# Altium PCB ADS8688.PcbDoc
Units mil, origin at the board's own origin, x right, y up, seen from the top; angles counter-clockwise.
Board outline 800 x 700 mil, 2 copper layers (Top Layer, Bottom Layer), stack 31.496 mil thick; 30 components, 47 nets, 145 pads, 41 vias.
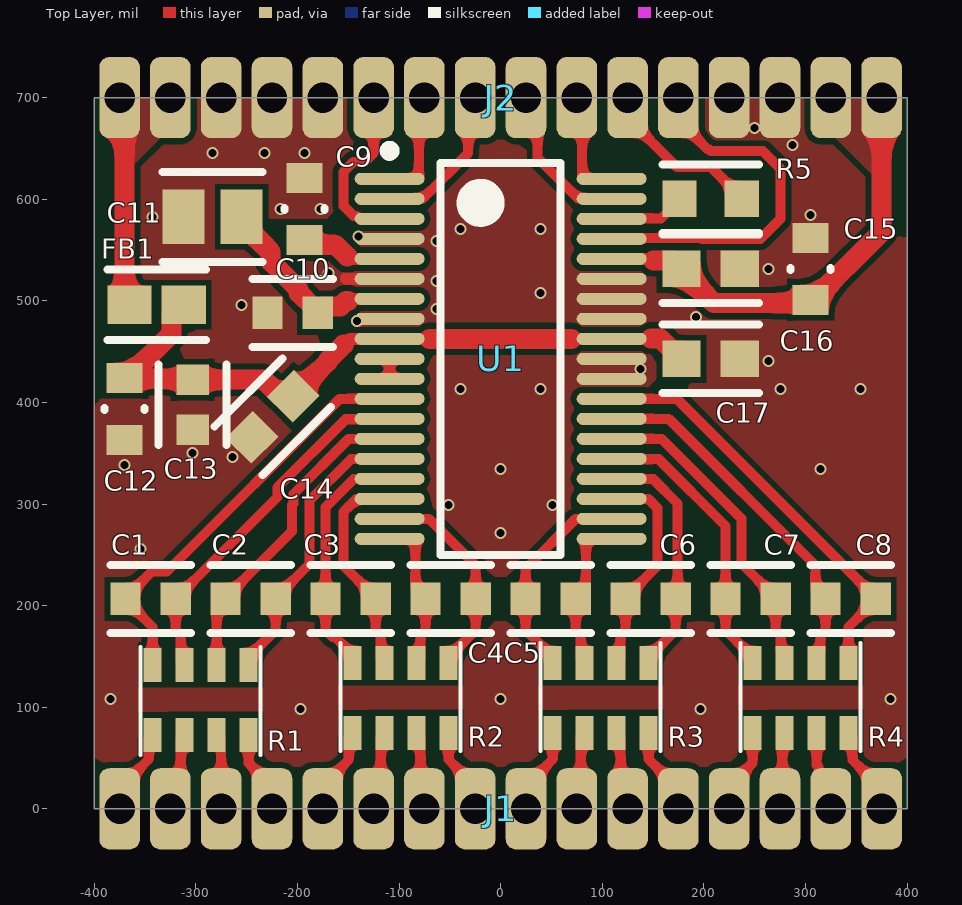
[diagram p0: Top Layer view]
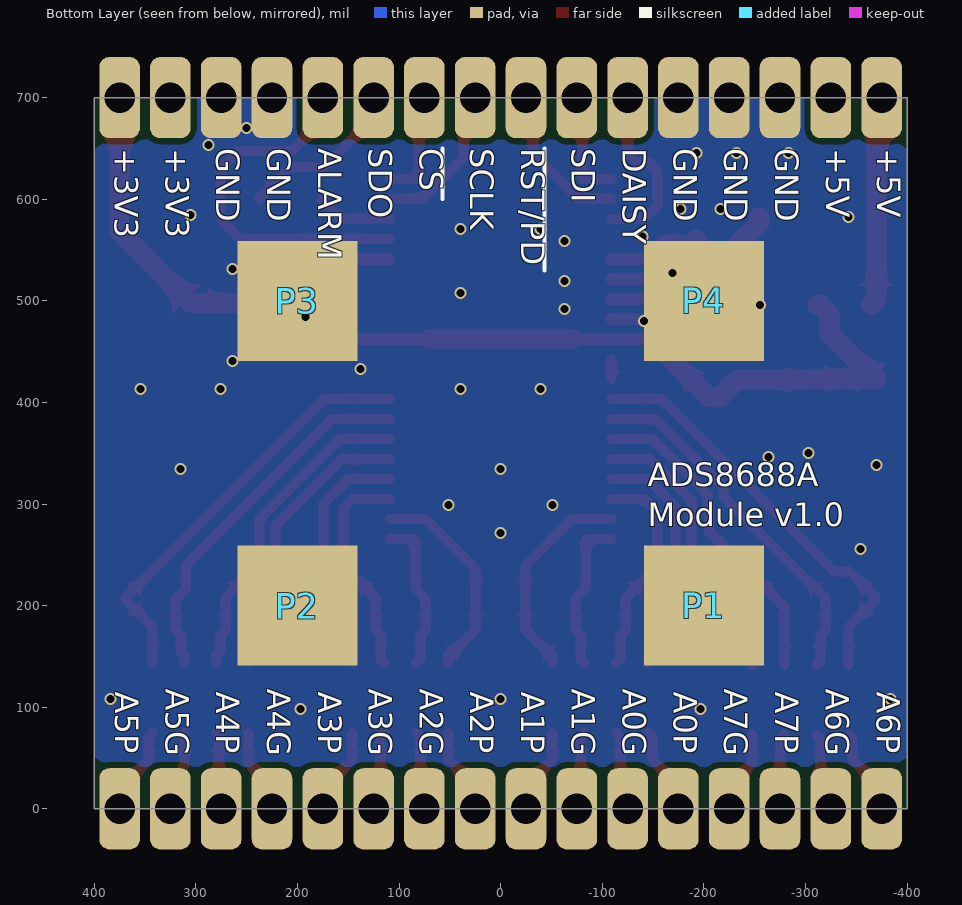
[diagram p1: Bottom Layer view, seen from below]
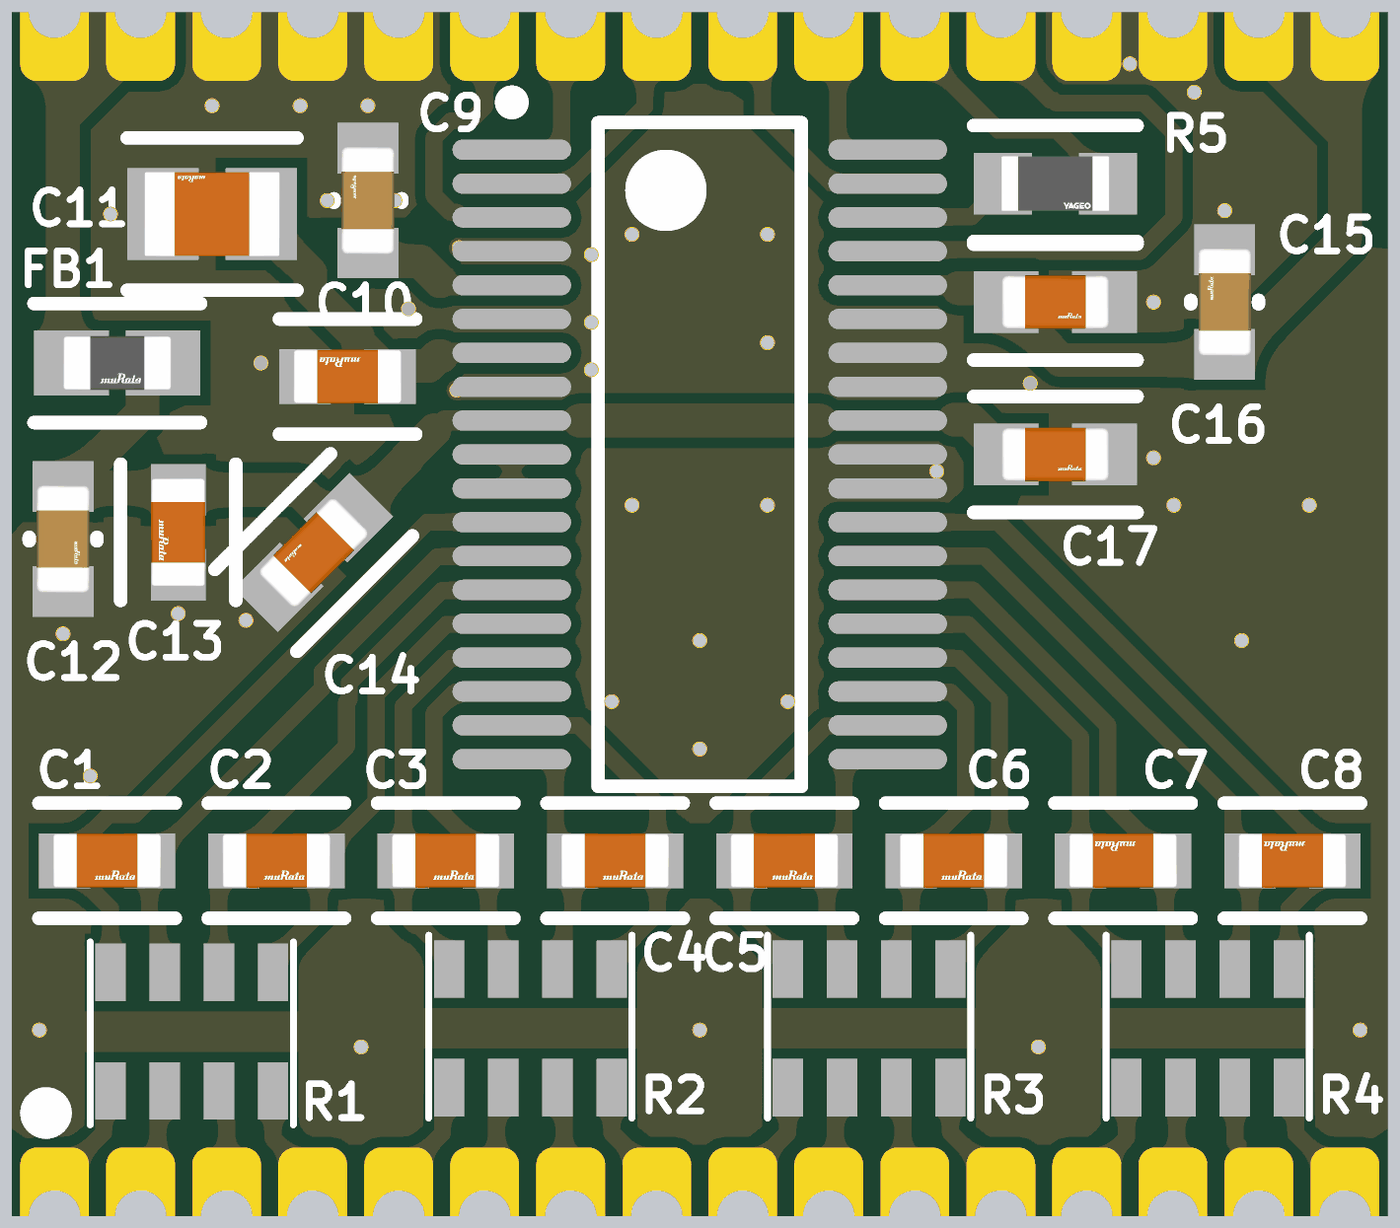
[diagram p2: 3D render of the assembled board from above, using the file's embedded part models]

## Layer stack, top to bottom
Top Solder: solder mask 0.3937, Solder Resist, Dk 3.5
Top Layer: signal copper 1.378
Dielectric 1: dielectric 28.7402, FR-4, Dk 4.8
Bottom Layer: signal copper 1.378
Bottom Solder: solder mask 0.3937, Solder Resist, Dk 3.5

## Board outline
400,0 400,700 -400,700 -400,0

## Design rules (kind name [scope] priority, off if disabled: settings)
Clearance Clearance_1 [OnMid vs OnMid] p1: gap=5.91 ignorepadtopadclearanceinfootprint=FALSE sourcerule=41 cellrowname=All cellrowtype=0 cellcolname=All cellcoltype=0 innerlayers=TRUE
Clearance Clearance_2 [(ExistsOnLayer('Top Layer') Or ExistsOnLayer('Bottom Layer')) vs (ExistsOnLayer('Top Layer') Or ExistsOnLayer('Bottom Layer'))] p2: gap=5.91 ignorepadtopadclearanceinfootprint=FALSE sourcerule=41 cellrowname=All cellrowtype=0 cellcolname=All cellcoltype=0 outerlayers=TRUE
Clearance [All] p3: gap=10 ignorepadtopadclearanceinfootprint=FALSE ismatrix=TRUE
DiffPairsRouting [All] p1: maxlimit=5.91 minlimit=5.91 mostfreqgap=5.91 toplayer_minwidth=15 toplayer_maxwidth=15 toplayer_prefwidth=15 bottomlayer_minwidth=15 bottomlayer_maxwidth=15 bottomlayer_prefwidth=15 maxuncoupledlength=500
PolygonConnect "Schematic Polygon Connect Style" [InNetClass('Power')] p1: connectstyle=Direct reliefconductorwidth=10 reliefentries=4 polygonreliefangle="90 Angle" airgapwidth=10
PolygonConnect [All] p2: connectstyle=Relief reliefconductorwidth=10 reliefentries=4 polygonreliefangle="90 Angle" airgapwidth=10
RoutingVias [All] p1: holewidth=28 width=50 viastyle="Through Hole" minholewidth=28 minwidth=50 maxholewidth=28 maxwidth=50
SolderMaskExpansion [All] p1: expansion=0 istentingtop=FALSE
SupplyNets "Schematic Supply Nets_2" [InNet('REFGND')] p1: voltage=0.000
SupplyNets "Schematic Supply Nets_1" [InNet('DVDD')] p2: voltage=0.000
SupplyNets "Schematic Supply Nets" [InNet('+5')] p3: voltage=0.000
Width "Schematic Width Constraint" [InNetClass('Power')] p1: maxlimit=39.37 minlimit=11.81 preferedwidth=19.68 minimp=50.000000 maximp=50.000000 favimp=50.000000
Width [All] p2: maxlimit=9.84 minlimit=9.84 preferedwidth=9.84 minimp=50.000000 maximp=50.000000 favimp=50.000000
29 further rules are at their usual default settings.

## Classes and differential pairs
net class Power: +5 AVDD DVDD REFCAP REFGND REFIO

## Components (designator, comment, footprint, x,y, rotation, side; value= is the part's Value field where it differs from the comment)
C1 "10 nF" FP-GRT188-0_1-e0_2_0_5-IPC_C -344.49,206.69 r0 top
C2 "10 nF" FP-GRT188-0_1-e0_2_0_5-IPC_C -246.06,206.69 r0 top
C3 "10 nF" FP-GRT188-0_1-e0_2_0_5-IPC_C -147.64,206.69 r0 top
C4 "10 nF" FP-GRT188-0_1-e0_2_0_5-IPC_C -49.21,206.69 r0 top
C5 "10 nF" FP-GRT188-0_1-e0_2_0_5-IPC_C 49.21,206.69 r0 top
C6 "10 nF" FP-GRT188-0_1-e0_2_0_5-IPC_C 147.64,206.69 r0 top
C7 "10 nF" FP-GRT188-0_1-e0_2_0_5-IPC_C 344.49,206.69 r180 top
C8 "10 nF" FP-GRT188-0_1-e0_2_0_5-IPC_C 246.06,206.69 r180 top
C9 "10 uF" FP-GRT188-0_2-MFG -192.91,590.55 r90 top
C10 "1 uF" FP-GRT188-0_1-e0_2_0_5-IPC_C -204.72,488.19 r180 top
C11 "22 uF" FP-GRT21B-0_2-IPC_C -283.46,582.68 r180 top
C12 "10 uF" FP-GRT188-0_2-MFG -370.08,393.7 r270 top
C13 "1 uF" FP-GRT188-0_1-e0_2_0_5-IPC_C -303.15,397.64 r270 top
C14 "100 nF" FP-GCM188-0_1-IPC_B -224.41,385.83 r225 top
C15 "10 uF" FP-GRT188-0_2-MFG 305.12,531.5 r90 top
C16 "100 nF" FP-GCM188-0_1-IPC_B 206.69,531.5 r0 top
C17 "100 nF" FP-GCM188-0_1-IPC_B 206.69,442.91 r0 top
FB1 "BLM18AG601BH1D" FP-BLM18-0_15-t0_8-IPC_B -338.58,496.06 r0 top
J1 "Castellation_16" Castellation_16_hole 0,0 r90 top
J2 "Castellation_16" Castellation_16_hole 0,700 r90 top
P1 "BottomPad" BottomPad -200,200 r180 bottom
P2 "BottomPad" BottomPad 200,200 r180 bottom
P3 "BottomPad" BottomPad 200,500 r180 bottom
P4 "BottomPad" BottomPad -200,500 r180 bottom
R1 "1k" CAY16A-1001F4LF -295.28,108.27 r0 top
R2 "1k" CAY16A-1001F4LF -98.43,108.27 r180 top
R3 "1k" CAY16A-1001F4LF 98.43,108.27 r180 top
R4 "1k" CAY16A-1001F4LF 295.28,108.27 r180 top
R5 "22Ω" FP-AC0603-IPC_B 206.69,600.39 r0 top
U1 "ADS8688AIDBTR" DBT38_N 0,442.91 r0 top

## Footprints (in the part's own frame and the unit in brackets; to place one, negate y for a bottom-side part, rotate by r counter-clockwise, add the part's x,y. Pads: shape width x height; smd on the part's side, far side on the other; paste and mask are expansions set on the pad)
BottomPad [mm]
  rect 3x3 smd: 1(0,0)
Castellation_16_hole [mil]
  rrect50% 80x40 hole 30: 1(0,375) 2(0,325) 3(0,275) 4(0,225) 5(0,175) 6(0,125) 7(0,75) 8(0,25) 9(0,-25) 10(0,-75) 11(0,-125) 12(0,-175) 13(0,-225) 14(0,-275) 15(0,-325) 16(0,-375)
CAY16A-1001F4LF [mm] "1kΩ Register array"
  rect 0.45x0.85 smd: 1(-1.2,-0.9) 2(-0.4,-0.9) 3(0.4,-0.9) 4(1.2,-0.9) 5(1.2,0.85) 6(0.4,0.85) 7(-0.4,0.85) 8(-1.2,0.85)
  silkscreen extent -1.5,-1.4 1.5,1.3, body extent -1.4,-1.2 1.4,1.1, height 0.25
DBT38_N [mm] "TSSOP, 38-Leads, Body 9.7x4.4mm, Pitch 0.5mm, IPC Medium Density"
  oval 1.75x0.3 smd: 1(-2.775,4.5) 2(-2.775,4) 3(-2.775,3.5) 4(-2.775,3) 5(-2.775,2.5) 6(-2.775,2) 7(-2.775,1.5) 8(-2.775,1) 9(-2.775,0.5) 10(-2.775,0) 11(-2.775,-0.5) 12(-2.775,-1) 13(-2.775,-1.5) 14(-2.775,-2) 15(-2.775,-2.5) 16(-2.775,-3) 17(-2.775,-3.5) 18(-2.775,-4) 19(-2.775,-4.5) 20(2.775,-4.5) 21(2.775,-4) 22(2.775,-3.5) 23(2.775,-3) 24(2.775,-2.5) 25(2.775,-2) 26(2.775,-1.5) 27(2.775,-1) 28(2.775,-0.5) 29(2.775,0) 30(2.775,0.5) 31(2.775,1) 32(2.775,1.5) 33(2.775,2) 34(2.775,2.5) 35(2.775,3) 36(2.775,3.5) 37(2.775,4) 38(2.775,4.5)
  silkscreen extent -2.9,-4.9 1.5,5.32, body extent -2.25,-4.9 2.25,4.9, height 1.2
FP-AC0603-IPC_B [mil]
  rect 33.81x35.91 smd paste+0 mask+0: 1(-30.58,0) 2(30.58,0)
  silkscreen extent -47,-34 47,34, body extent -57,-28 57,28, height 10
FP-BLM18-0_15-t0_8-IPC_B [mil]
  rect 43.55x37.73 smd paste+0 mask+0: 1(-26.62,0) 2(26.62,0)
  silkscreen extent -48,-35 48,35, body extent -58,-29 58,29, height 10
FP-GCM188-0_1-IPC_B [mil]
  rect 37.74x35.91 smd paste+0 mask+0: 1(-28.61,0) 2(28.61,0)
  silkscreen extent -47,-34 47,34, body extent -57,-28 57,28, height 10
FP-GRT21B-0_2-IPC_C [mil]
  rect 41.52x53.39 smd paste+0 mask+0: 1(-28.57,0) 2(28.57,0)
  silkscreen extent -49,-44 49,44, body extent -53,-32 53,32, height 10
FP-GRT188-0_1-e0_2_0_5-IPC_C [mil]
  rect 29.87x31.97 smd paste+0 mask+0: 1(-24.67,0) 2(24.67,0)
  silkscreen extent -40,-33 40,33, body extent -44,-22 44,22, height 10
FP-GRT188-0_2-MFG [mm]
  rect 0.75x0.9 smd paste+0 mask+0: 1(-0.775,0) 2(0.775,0)
  silkscreen extent -0.03,-0.5 0.03,0.5, body extent -1.25,-0.6 1.25,0.6, height 0.25

## Part data
C1 C2 C3 C4 C5 C6 C7 C8: library part CMP-06035-024823-1, "Multi-Layer Ceramic Capacitor 10nF 25V C0G ±1% 0603 Paper T/R / GRT1885C1E103FA02D / 0603"
C9 C12 C15: library part CMP-06035-032378-1, "Multi-Layer Ceramic Capacitor 10uF 25V X5R ±20% 0603 Paper T/R / GRT188R61E106ME13D / 10 uF", Capacitance=10uF, Case Code (Imperial)=0603, Case Code (Metric)=1608, Max Operating Temperature=85°C, Min Operating Temperature=-55°C, Ratings=AEC-Q200, Tolerance=20%, Voltage Rating=25V, Case/Package=0603, Length=0.063inch, Mount="Surface Mount", Packaging="Tape and Reel", Thickness=0.035inch, Width=0.031inch
C10 C13: library part CMP-06035-050353-1, "Multi-Layer Ceramic Capacitor 1uF 25V X7R ±10% 0603 Paper T/R / GRT188R71E105KE13D / 1 uF"
C11: library part CMP-06035-011672-1, "Multi-Layer Ceramic Capacitor 22uF 25V X5R ±20% 0805 Emboss T/R / GRT21BR61E226ME13L / 22 uF", Capacitance=22uF, Case Code (Imperial)=0805, Case Code (Metric)=2012, Max Operating Temperature=85°C, Min Operating Temperature=-55°C, Ratings=AEC-Q200, Tolerance=20%, Voltage Rating=25V, Case/Package=0805, Length=0.079inch, Mount="Surface Mount", Packaging="Tape and Reel", Thickness=0.057inch, Width=0.049inch
C14 C16 C17: library part CMP-06035-005116-1, "Ceramic Capacitor for Automotive 100nF  ±20% 25VDC X8R 0603 Paper T/R / GCM188R91E104MA37J / 100 nF"
FB1: library part CMP-06046-002494-1, "Chip Ferrite Bead, 0603, 600Ω @ 100MHz, 0.38Ω, 25%, 500mA", Case Code (Imperial)=0603, Case Code (Metric)=1608, DC Resistance (DCR)=380mR, Max Current Rating=500mA, Max Operating Temperature=150°C, Min Operating Temperature=-55°C, Ratings=AEC-Q200, Case/Package=0603, Number of Lines=1, RoHS Compliant=Yes
J1 J2: "8 holes"
R1 R2 R3 R4: library part CAY16A-1001F4LF
R5: library part CMP-03412-040387-1, "RES 22Ω 5.00% 0.1W 0603 / AC0603JR-0722RL", Case Code (Imperial)=0603, Case Code (Metric)=1608, Max Operating Temperature=155°C, Max Power Dissipation=100mW, Min Operating Temperature=-55°C, Ratings=AEC-Q200, Resistance=22R, Resistor Type="Thick Film", Temperature Coefficient=100ppm/°C, Tolerance=5%, Voltage Rating=50V, Case/Package=0603, Features="Moisture Resistant", Height=0.45mm, Length=1.6mm, Number of Terminations=2, Packaging="Tape and Reel", Power Rating=100mW, Series=AC, Termination=SMD/SMT, Width=0.8mm
U1: "Single-Supply, SAR ADCs with Bipolar Input Ranges, 16 Bits, 500 kSPS, 8 Channel, -40 to 125 degC, 38-Pin TSSOP (DBT), Green (RoHS & no Sb/Br), Tape and Reel", Manufacturer="Texas Instruments", PartNumber=ADS8688IDBTR, Temperature Range="-40 to 125 degC", AVDD="4.75 to 5.25 V", ComponentLink1Description="Manufacturer URL", ComponentLink1URL=www.ti.com, ComponentLink2Description=Datasheet, ComponentLink2URL=http://www.ti.com/lit/ds/symlink/ads8688.pdf, ComponentLink3Description="Package Specification", ComponentLink3URL=http://www.ti.com/lit/ml/mpds368/mpds368.pdf, DatasheetVersion=SBAS582B, Eco-Plan="Green (RoHS & no Sb/Br)", Input Channel=8, Mounting Technology="Surface Mount", PackageDescription="38-Pin Plastic Small Outline Package, Body 9.7 x 4.4 mm, Pitch 0.5 mm", PackageVersion=4073252-6/I, Packing="Tape and Reel", Resolution="16 Bits", Sample Rate="500 kSPS", SNR="92 dB", THD="-102 dB"

## Free pads (board coordinates)
  round 30 on Top Overlay: ""(-380,60)

## Via types
v1: diameter 11.81, hole 7.87, Top Layer to Bottom Layer, tented both sides, 36 vias
v2: diameter 11.81, hole 7.87, Top Layer to Bottom Layer, tented top, 5 vias

## Nets (pads, with @x,y where several pads share a name; then routed paths per layer and width w, separated by ;. In a path a pad name is that pad's centre, name@x,y a point inside that pad or via, vN(x,y) a via of type N, cw(c..) or ccw(c..) an arc to the next point about the centre after c; other vN are vias at no path point)
+5: FB1.1 J2.1 J2.2 | length 208
  Top Layer w19.68: J2.1 -370.1,695.1 -370.1,500.96 FB1.1
AIN_0GND: J1.6 R2.6 | length 79.3
  Top Layer w9.84: J1.6 -118.11,6.89 -118.11,70.87 R2.6
AIN_0GND_m: C3.2 R2.3 U1.17 | length 215.9
  Top Layer w9.84: R2.3 -118.11,147.64 -118.11,171.09 -122.96,175.94 -122.96,207.74 -154.53,239.31 -154.53,292.36 -142.15,304.74 -109.63,304.74 U1.17
AIN_0P: J1.5 R2.5 | length 87
  Top Layer w9.84: J1.5 -175,22.75 -149.61,48.14 -149.61,70.87 R2.5
AIN_0P_m: C3.1 R2.4 U1.16 | length 240.2
  Top Layer w9.84: R2.4 -145.67,151.57 -163.08,168.98 -165.35,168.98 -172.31,175.94 -172.31,296.85 -144.74,324.43 -109.63,324.43 U1.16
AIN_1GND: J1.7 R2.7 | length 78
  Top Layer w9.84: R2.7 -78.84,70.96 -78.84,3.84 J1.7
AIN_1GND_m: C4.1 R2.2 U1.19 | length 154.7
  Top Layer w9.84: U1.19 -84.81,265.75 -83.9,264.84 -83.9,217.76 -73.89,207.74 -73.89,175.94 -78.74,171.09 -78.74,147.64 R2.2
AIN_1P: J1.8 R2.8 | length 85.6
  Top Layer w9.84: R2.8 -51.18,48.42 -25,22.24 J1.8
AIN_1P_m: C4.2 R2.1 U1.18 | length 211.9
  Top Layer w9.84: U1.18 -70.43,285.43 -24.54,239.54 C4.2 -24.54,175.94 -44.97,155.51 -47.24,155.51 -51.18,151.57 R2.1
AIN_2GND: J1.10 R3.6 | length 78
  Top Layer w9.84: J1.10 78.84,3.84 78.84,70.96 R3.6
AIN_2GND_m: C5.2 R3.3 U1.20 | length 154.7
  Top Layer w9.84: R3.3 78.74,147.64 78.74,171.09 73.89,175.94 C5.2 83.9,216.71 83.9,264.84 84.81,265.75 U1.20
AIN_2P: J1.9 R3.5 | length 85.6
  Top Layer w9.84: J1.9 25,22.24 51.18,48.42 R3.5
AIN_2P_m: C5.1 R3.4 U1.21 | length 208.3
  Top Layer w9.84: C5.1 24.54,175.94 44.97,155.51 47.24,155.51 51.18,151.57 R3.4 ; C5.1@24.54,207.74 24.54,236.03 73.57,285.06 U1.21@108.88,285.06
AIN_3GND: J1.11 R3.7 | length 79.3
  Top Layer w9.84: R3.7 118.11,70.87 118.11,6.89 J1.11
AIN_3GND_m: C6.1 R3.2 U1.22 | length 218
  Top Layer w9.84: U1.22 109.63,304.74 145.7,304.74 154.53,295.92 154.53,239.31 122.96,207.74 122.96,175.94 118.11,171.09 118.11,147.64 R3.2
AIN_3P: J1.12 R3.8 | length 87
  Top Layer w9.84: R3.8 145.67,48.78 175,19.45 J1.12
AIN_3P_m: C6.2 R3.1 U1.23 | length 245
  Top Layer w9.84: U1.23 109.63,324.43 150.3,324.43 174.21,300.52 174.21,208.59 C6.2 172.31,175.94 151.88,155.51 149.61,155.51 145.67,151.57 R3.1
AIN_4GND: J1.13 R4.5 | length 84.3
  Top Layer w9.84: J1.13 225,22.24 248.03,45.27 R4.5
AIN_4GND_m: C8.2 R4.4 U1.24 | length 286.6
  Top Layer w9.84: U1.24 109.63,344.11 155.67,344.11 221.39,278.4 C8.2 221.39,175.94 241.82,155.51 244.09,155.51 248.03,151.57 R4.4
AIN_4P: J1.14 R4.6 | length 76.7
  Top Layer w9.84: J1.14 277.26,2.26 277.26,72.54 R4.6
AIN_4P_m: C8.1 R4.3 U1.25 | length 319.8
  Top Layer w9.84: U1.25 158.46,364.17 237.14,285.5 237.14,241.34 270.74,207.74 270.74,175.94 275.59,171.09 275.59,155.51 279.53,151.57 R4.3
AIN_5GND: J1.15 R4.7 | length 80.5
  Top Layer w9.84: R4.7@311.11,74.8 311.11,43.31 313.06,41.36 313.06,12.03 J1.15
AIN_5GND_m: C7.2 R4.2 U1.26 | length 364
  Top Layer w9.84: U1.26 165.49,383.86 309.8,239.55 309.8,216.71 C7.2 319.81,175.94 314.96,171.09 314.96,155.51 311.02,151.57 R4.2
AIN_5P: J1.16 R4.8 | length 88.3
  Top Layer w9.84: R4.8 346.46,70.87 346.46,48 375,19.45 J1.16
AIN_5P_m: C7.1 R4.1 U1.27 | length 416.1
  Top Layer w9.84: U1.27 173.36,403.54 369.16,207.74 369.16,205.64 342.52,179 R4.1
AIN_6GND: J1.2 R1.2 | length 78.6
  Top Layer w9.84: J1.2 -314.96,10.04 -314.96,68.9 R1.2
AIN_6GND_m: C1.2 R1.7 U1.13 | length 359.8
  Top Layer w9.84: C1.2 C1.2@-319.81,207.74 ; R1.7 -314.96,145.67 -314.96,171.09 -319.81,175.94 C1.2@-319.81,207.74 ; U1.13 -109.63,383.48 -152.49,383.48 -219.56,316.42 -219.56,306.95 -308.75,217.76 -309.8,217.76 C1.2@-319.81,207.74
AIN_6P: J1.1 R1.1 | length 86.3
  Top Layer w9.84: J1.1 -375,20 -346.46,48.54 -346.46,68.9 R1.1
AIN_6P_m: C1.1 R1.8 U1.12 | length 419.1
  Top Layer w9.84: C1.1 C1.1@-369.16,207.74 ; R1.8 -342.52,179 -369.16,205.64 C1.1@-369.16,207.74 ; U1.12 -158.39,403.54 -328.43,233.51 -343.4,233.51 C1.1@-369.16,207.74
AIN_7GND: J1.4 R1.4 | length 82.4
  Top Layer w9.84: R1.4 -248.03,45.27 -225,22.24 J1.4
AIN_7GND_m: C2.2 R1.5 U1.15 | length 281.4
  Top Layer w9.84: R1.5 -248.03,149.61 -230.18,167.46 -229.87,167.46 -221.39,175.94 C2.2 ; C2.2@-221.39,207.74 -188.06,241.07 -188.06,303.37 -147.32,344.11 -109.63,344.11 U1.15
AIN_7P: J1.3 R1.3 | length 74.7
  Top Layer w9.84: R1.3 -275.59,68.9 -275.59,55.35 -275,54.76 J1.3
AIN_7P_m: C2.1 R1.6 U1.14 | length 316.6
  Top Layer w9.84: R1.6 -279.53,198.95 -205.31,273.17 -205.31,298.92 -203.81,300.43 -203.81,309.9 -149.91,363.8 -109.63,363.8 U1.14
ALARM: J2.12 U1.35 | length 367.2
  Top Layer w9.84: U1.35 138.33,561.02 139.31,562.01 197.12,562.01 198.1,561.02 255.91,561.02 275.59,580.71 275.59,629.92 258.31,647.2 207.31,647.2 205.66,648.86 203.9,648.86 175,677.76 J2.12
AVDD: C12.1 C13.1 C14.1 C17.1 FB1.2 U1.9 U1.30 | length 682.7
  Top Layer w11.81: -154.32,456.91 -154.08,456.91 -148.39,462.6 -70.41,462.6 ; 70.41,462.6 142.76,462.6 143.3,463.15 148.19,463.15
  Top Layer w19.68: FB1.2 -314.88,496.06 -323.9,487.04 -323.9,467.44 -362.2,429.13 -365.16,429.13 C12.1 -369.13,423.26 -304.1,423.26 C13.1 -233.2,422.31 -216.3,405.41 -204.83,405.41 -169.95,440.28 -169.95,441.38 -154.42,456.91 -154.32,456.91 ; -69.77,462.6 69.77,462.6 ; 148.19,463.15 156.93,463.15 169.05,451.03 C17.1@177.17,451.03
C\S\: J2.10 U1.38 | length 110.5
  Top Layer w9.84: J2.10 80.33,694.67 80.33,620.99 81.24,620.08 U1.38
DAISY: J2.6 U1.3 | length 175.9
  Top Layer w9.84: J2.6 -125,645.24 -133.43,636.81 -144.73,636.81 -154.53,627.01 -154.53,593.46 -144.73,583.66 -141.28,583.66 -138.33,580.71 U1.3
DVDD: C15.1 C16.1 J2.15 J2.16 U1.34 | length 443
  Top Layer w11.81: U1.34 147.64,541.34
  Top Layer w19.68: 150.46,539.61 169.97,539.61 C16.1 179,531.5 187.11,523.38 187.11,520.59 209.91,497.79 304.88,497.79 375,567.91 J2.16
NetU1_10: U1.10 U1.11 | length 19.7
  Top Layer w9.84: U1.11 U1.10
R\S\T\/P\D\: J2.8 U1.2 | length 153.6
  Top Layer w9.84: U1.2 -108.88,600.77 -76.35,600.77 -31.89,645.24 -31.89,693.11 J2.8
REFCAP: C10.1 C11.1 U1.7 | length 201.6
  Top Layer w11.81: -150.24,500 -148.28,501.97 U1.7
  Top Layer w19.68: C11.1 -254.89,576.74 -226.38,548.23 -226.38,538.75 -198.71,511.09 -198.71,507.9 -185.14,494.33 -185.14,493.28 C10.1 ; C10.1@-180.05,489.24 -174.96,494.33 -157.83,494.33 -152.16,500 -150.24,500
REFGND: C9.2 C10.2 C11.2 C12.2 C13.2 C14.2 C15.2 C16.2 C17.2 J2.3 J2.4 J2.5 J2.13 J2.14 P1.1 P2.1 P3.1 P4.1 U1.4 U1.6 U1.8 U1.28 U1.29 U1.31 U1.32 U1.33 | length 75.7
  Top Layer w11.81: -152,522 -151.65,521.65 U1.6 ; v2(-141.22,480.31) -139.76,480.31 -137.8,482.28 U1.8
  other v1: -196.85,98.43 196.85,98.43 -383.86,108.27 0,108.27 383.86,108.27 -354.33,255.91 0,271.65 -51.18,299.21 51.18,299.21 0,334.65 314.96,334.65 -370.08,338.58 -263.78,346.46 -303.15,350.39 -39.37,413.39 39.37,413.39 275.59,413.39 354.33,413.39 137.8,433.07 263.78,440.94 -62.99,492.13 39.37,507.87 -62.99,519.68 263.78,531.5 -62.99,559.06 -39.37,570.87 39.37,570.87 -342.52,582.68 305.12,584.65 -216.54,590.55 -177.17,590.55 -283.46,645.67 -232.28,645.67 -192.91,645.67 287.4,653.54 250,670
  other v2: 192.13,484.25 -255.12,496.06 -169.29,527.56 -139.89,563.12
REFIO: C9.1 U1.5 | length 91.4
  Top Layer w11.81: -150.72,543.65 -148.41,541.34 U1.5
  Top Layer w19.68: C9.1 -187.99,555.12 -162.51,555.12 -151.05,543.65 -150.72,543.65
SCLK: J2.9 U1.37 | length 153.6
  Top Layer w9.84: J2.9 36.54,688.46 36.54,640.59 76.35,600.77 108.88,600.77 U1.37
SDI: J2.7 U1.1 | length 110.5
  Top Layer w9.84: U1.1 -81.24,620.08 -80.33,620.99 -80.33,694.67 J2.7
SDO: J2.11 R5.2 | length 165.9
  Top Layer w9.84: J2.11 125,680 173.54,631.46 207.26,631.46 237.27,601.45 R5.2
SDO_: R5.1 U1.36 | length 75.6
  Top Layer w9.84: U1.36 109.63,581.09 157.86,581.09 176.11,599.34 R5.1

## Polygon pours and split planes (outlines as drawn)
DVDD on Top Layer "NONET_L-01_P-001" (solid, pour order 6): 315,700 375,700 375,615 315,675 315,685
REFGND on Top Layer "NONET_L-01_P-001" (solid, pour order 8): -400,700 400,700 400,0 -400,0
+5 on Top Layer "NONET_L-01_P-001" (solid, pour order 0): -315,700 -375,700 -375,625 -370,625 -315,680
REFGND on Bottom Layer "NONET_L-01_P-001" (solid, pour order 7): -400,700 400,700 400,0 -400,0

## Silkscreen, mask and mechanical layers (free items; w line width, h text height)
Bottom Overlay:
  lines w3.94: -43,530 -43,650 ; 57,600 57,650
  text "+5V" at -362.6,650 h39.37 r90
  text "+5V" at -312.6,650 h39.37 r90
  text "GND" at -262.38,650 h39.37 r90
  text "GND" at -212.38,650 h39.37 r90
  text "GND" at -162.38,650 h39.37 r90
  text "DAISY" at -112.38,650 h39.37 r90
  text "SDI" at -62.38,650 h39.37 r90
  text "RST/PD" at -12.39,650 h39.37 r90
  text "SCLK" at 37.62,650 h39.37 r90
  text "CS" at 87.62,650 h39.37 r90
  text "SDO" at 137.62,650 h39.37 r90
  text "ALARM" at 187.61,650 h39.37 r90
  text "GND" at 237.62,650 h39.37 r90
  text "GND" at 287.62,650 h39.37 r90
  text "+3V3" at 337.44,650 h39.37 r90
  text "+3V3" at 387.44,650 h39.37 r90
  text "ADS8688A / Module v1.0" at -145,270 h39.37
  text "https://github.com/ORyomei/ads8688a-module" at -137.58,212.5 h0 r270
  text "A6G" at -312.38,118.26 h39.37 r90
  text "A7G" at -212.38,118.26 h39.37 r90
  text "A0G" at -112.38,118.26 h39.37 r90
  text "A1G" at -62.38,118.26 h39.37 r90
  text "A2G" at 87.62,118.26 h39.37 r90
  text "A3G" at 137.62,118.26 h39.37 r90
  text "A4G" at 237.62,118.26 h39.37 r90
  text "A5G" at 337.62,118.26 h39.37 r90
  text "A6P" at -362.56,115.03 h39.37 r90
  text "A7P" at -262.39,115.03 h39.37 r90
  text "A0P" at -162.56,115.03 h39.37 r90
  text "A1P" at -12.36,115.03 h39.37 r90
  text "A2P" at 37.64,115.03 h39.37 r90
  text "A3P" at 187.44,115.03 h39.37 r90
  text "A4P" at 287.61,115.03 h39.37 r90
  text "A5P" at 387.4,115.03 h39.37 r90